# Altium PCB SPECCY2010.PcbDoc (part 2 of 2)
Units mil, origin at the board's own origin, x right, y up, seen from the top; angles counter-clockwise.
Board outline 6692.91 x 4724.41 mil, 2 copper layers (Top Layer, Bottom Layer); 70 components, 123 nets, 541 pads, 228 vias.
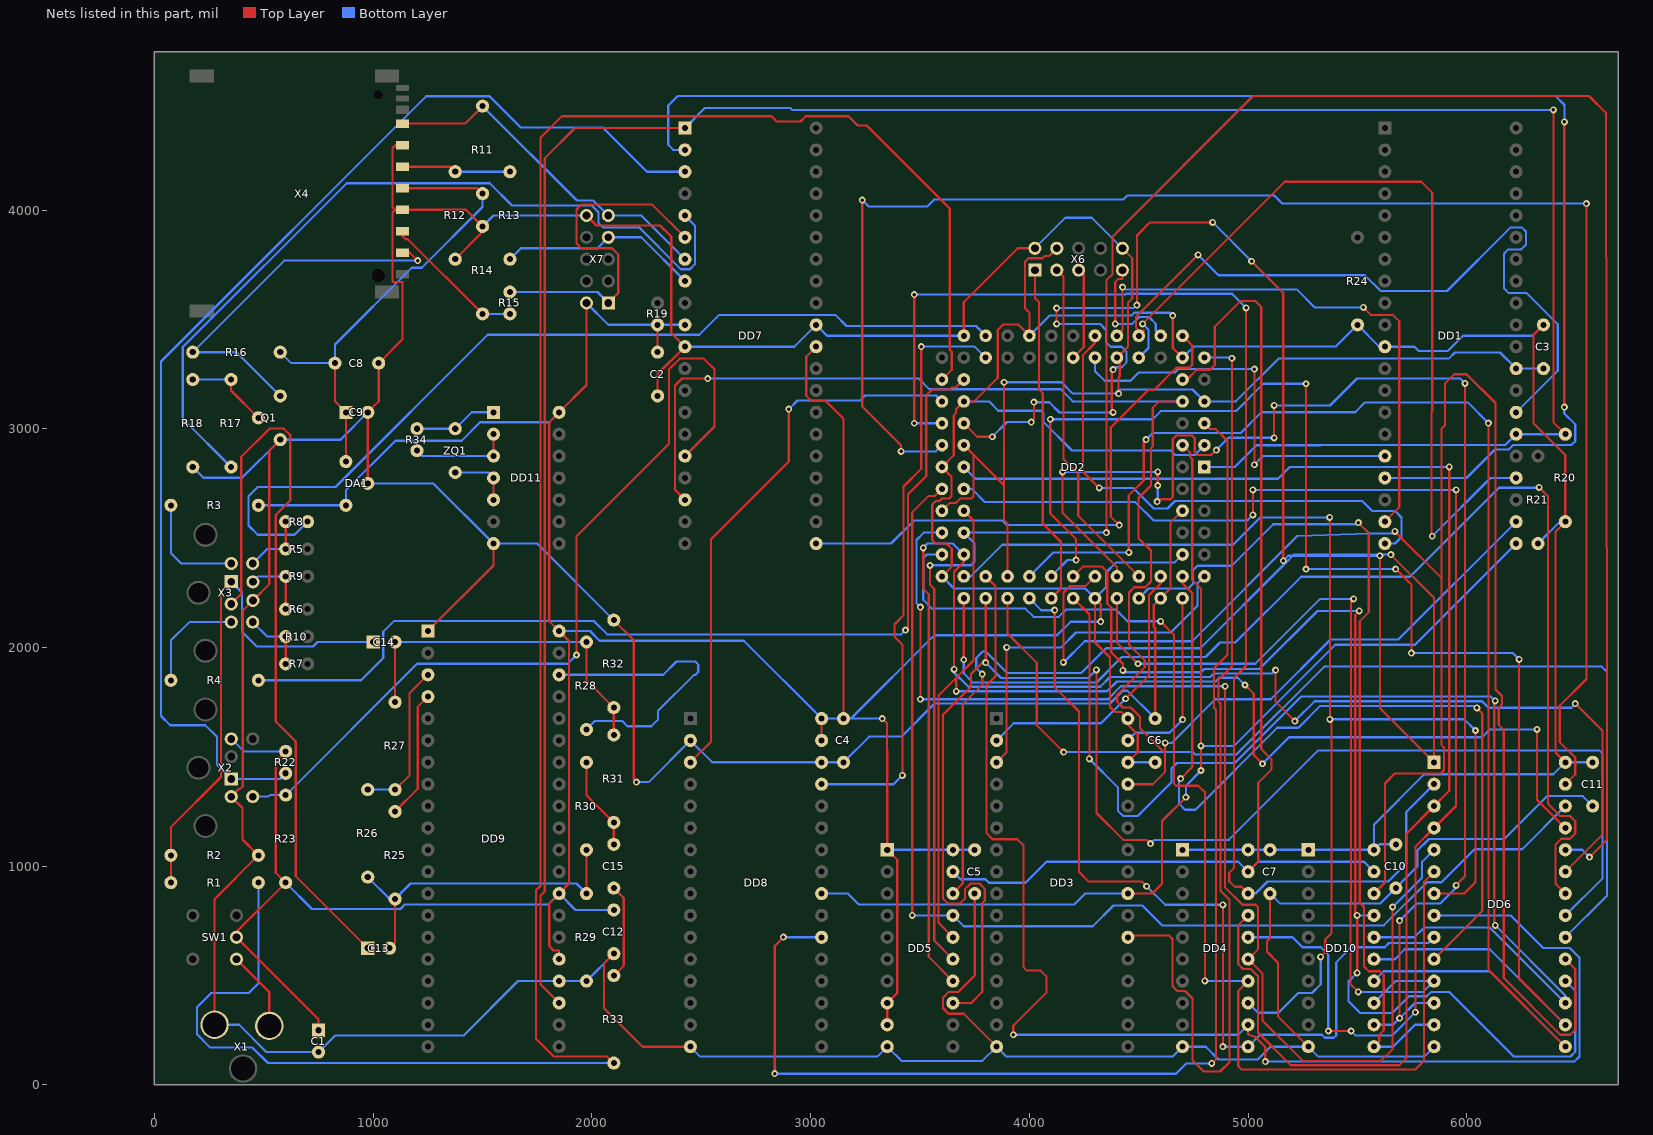
[diagram p2: the nets of this part, all layers, seen from the top]

## Via types
v1: diameter 31.5, hole 15.75, Top Layer to Bottom Layer, tented both sides, 228 vias

## Nets (pads, with @x,y where several pads share a name; then routed paths per layer and width w, separated by ;. In a path a pad name is that pad's centre, name@x,y a point inside that pad or via, vN(x,y) a via of type N, cw(c..) or ccw(c..) an arc to the next point about the centre after c; other vN are vias at no path point) (continued)
GND: C1.MINUS C2.2 C3.2 C4.2 C5.2 C6.2 C7.2 C8.2 C9.MINUS C10.2 C11.2 C12.2 DA1.2 DD1.29 DD2.7 DD2.19 DD2.32 DD2.42 DD2.47 DD2.59 DD2.72 DD2.82 DD3.16 DD4.10 DD5.10 DD6.14 DD7.11 DD7.31 DD8.2 DD8.16 DD8.30 DD9.1 DD9.24 DD10.10 DD11.7 Q1.1 R2.2 R12.2 R14.2 R18.1 R29.2 R32.2 X1.1 X2.3 X3.4 X4.3 X4.6 X6.2 X6.10 X7.10 | length 31758.3
  Top Layer w10: X1.1@275,275 275,850 R2.2@475,1050 402.5,1122.5 402.5,1266.5 X2.3@351,1318 386.5,1353.5 391.5,1353.5 403.5,1365.5 403.5,2168.5 X3.4@450,2215 524.5,2289.5 524.5,2899.5 Q1.1@575,2950 ; DA1.2@975,2750 C9.MINUS@975,3075 1025,3125 C8.2@1025,3300 1133.5,3408.5 1133.5,3670.5 1088.5,3670.5 1088.5,3988.18 1101.5,4001.18 ; X4.6@1133.66,4296.46 1101.5,4296.46 1088.5,4283.46 1088.5,4011.5 1098.81,4001.18 1101.5,4001.18 ; DD9.1@1250,2075 1550,2375 DD11.7@1550,2475 ; R12.2@1375,3775 1500,3900 R14.2@1500,3925 1423.82,4001.18 X4.3@1133.66,4001.18 ; X7.10@1975,3975 2020.5,3929.5 2311.5,3929.5 2362.5,3878.5 2362.5,3437.5 DD7.11@2425,3375 2300,3250 C2.2@2300,3150 ; C12.2@2100,600 2054.5,554.5 2054.5,351.5 2230.99,175 DD8.16@2450,175 ; R32.2@2100,2125 2190.75,2034.25 2190.75,1397.24 v1(2203.5,1384.5) ; DD2.47@3600,2625 3636,2661 3664,2661 3683.5,2680.5 3733.5,2680.5 3744.5,2691.5 3744.5,2880.5 ; DD2.32@3700,3425 3700,3578.5 3946.5,3825 X6.2@4025,3825 ; C5.2@3750,875 3750,500 3675.5,425.5 3631.5,425.5 3604.5,398.5 3604.5,351.5 3630.5,325.5 3699.5,325.5 DD3.16@3850,175 ; v1(3884.5,3212.5) 3884.5,2740.5 ; DD2.59@3900,2325 3900,2564.92 3884.5,2580.43 ; v1(4407.5,3160.5) 4407.5,3233.76 4413.24,3239.5 4413.24,3311.76 DD2.19@4400,3325 4450.5,3375.5 4450.5,3576.24 4470.5,3596.24 4470.5,3779.5 X6.10@4425,3825 ; C6.2@4575,1675 4575,2088.75 4568.75,2095 4568.75,2193.75 DD2.72@4600,2225 4644.5,2269.5 4644.5,2569.5 DD2.82@4700,2625 ; C7.2@5100,875 5100,671.24 5085.75,656.99 5085.75,609.75 5135.75,559.75 5135.75,314.25 DD10.10@5275,175 ; 1101.5,4001.18 X4.3@1133.66,4001.18 ; 1101.5,4001.18 X4.3@1133.66,4001.18 ; 3744.5,2880.5 DD2.42@3700,2925 3744.5,2880.5 ; 3744.5,2880.5 3884.5,2740.5 ; 3884.5,2580.43 3884.5,2740.5 ; 3884.5,2580.43 3884.5,2740.5
  Bottom Layer w10: R18.1@175,2825 224.5,2775.5 400.5,2775.5 Q1.1@575,2950 850,2950 C9.MINUS@975,3075 ; X1.1@275,275 386.99,275 511.99,150 C1.MINUS@750,150 825.5,225.5 1412.5,225.5 1662,475 DD9.24@1850,475 R29.2@1975,475 1975,475.5 2099.5,600 C12.2@2100,600 ; DA1.2@975,2750 1275,2750 DD11.7@1550,2475 1750,2475 R32.2@2100,2125 ; R14.2@1500,3925 1550,3975 X7.10@1975,3975 ; v1(2203.5,1384.5) 2259.5,1384.5 DD8.2@2450,1575 2550,1475 DD8.30@3050,1475 C4.2@3150,1475 3267.5,1592.5 3415.5,1592.5 3566.5,1743.5 4368.5,1743.5 4427.48,1802.48 4447.52,1802.48 C6.2@4575,1675 ; DD7.11@2425,3375 2925,3375 DD7.31@3025,3475 3075,3425 DD2.32@3700,3425 ; DD8.16@2450,175 2495.5,129.5 3304.5,129.5 DD5.10@3350,175 3415,110 3785,110 DD3.16@3850,175 3895.5,129.5 4654.5,129.5 DD4.10@4700,175 4805.99,175 4864.5,116.5 5043.5,116.5 5102,175 DD10.10@5275,175 5320.5,129.5 5804.5,129.5 DD6.14@5850,175 ; v1(3884.5,3212.5) 4146.5,3212.5 4198.5,3160.5 v1(4407.5,3160.5) 4407.5,3179.5 4745.5,3179.5 DD2.7@4800,3125 4943.5,3125 5138.99,3320.5 5917.56,3320.5 5945.31,3348.24 6151.76,3348.24 DD1.29@6225,3275 C3.2@6350,3275 ; X6.2@4025,3825 4164.5,3964.5 4285.5,3964.5 X6.10@4425,3825 ; C7.2@5100,875 5145,830 5605,830 C10.2@5675,900 5773.5,998.5 5773.5,1071.5 5826.5,1124.5 6170.5,1124.5 6366.5,1320.5 6529.5,1320.5 C11.2@6575,1275
INT: DD1.16 DD2.21 | length 1880.2
  Top Layer w10: v1(5028.5,2835.5) v1(5028.5,3272.5)
  Bottom Layer w10: DD2.21@4300,3325 4300,3263.24 4343.74,3219.5 4462.5,3219.5 4499.89,3256.89 4663.89,3256.89 4679.5,3272.5 v1(5028.5,3272.5) ; v1(5028.5,2835.5) 5068,2875 DD1.16@5625,2875
IOREQ: DD1.20 DD2.20 | length 2394.1
  Top Layer w10: DD2.20@4300,3425 4300,3392 4244.5,3336.5 4244.5,2804.5 v1(4319.5,2729.5)
  Bottom Layer w10: v1(4319.5,2729.5) 4474.75,2729.5 4568.5,2635.75 4631.5,2635.75 4665.5,2669.75 5521.24,2669.75 5566.5,2624.5 5671.5,2624.5 5701.5,2594.5 5701.5,2505 5671.5,2475 DD1.20@5625,2475
KCLK: DD7.16 R23.2 X2.5 | length 3931.1
  Top Layer w10: v1(1929.5,1965.5) 1929.5,2508.5 2352.5,2931.5 2352.5,3271.48 2401.52,3320.5 2511.5,3320.5 2560.5,3271.5 2560.5,3010.5 DD7.16@2425,2875
  Bottom Layer w10: X2.5@449,1318 520.5,1318 527.5,1325 R23.2@600,1325 1200.5,1925.5 1889.5,1925.5 v1(1929.5,1965.5)
KDAT: DD7.3 R22.2 X2.1 | length 5436.4
  Bottom Layer w10: R22.2@600,1425 574,1399 X2.1@351,1399 285.5,1464.5 285.5,1591.5 232.5,1644.5 71.5,1644.5 29.5,1686.5 29.5,3307.5 1242,4520 1531.5,4520 1674,4377.5 2049.5,4377.5 2251.99,4175 DD7.3@2425,4175
M1: DD1.27 DD2.16 | length 3352.2
  Top Layer w10: DD2.16@4500,3425 4522.5,3447.5 4521.24,3448.75 4500,3448.75 4499.5,3448.75 4486.75,3461.5 4486.75,3510.5 v1(4771.12,3794.87)
  Bottom Layer w10: v1(4771.12,3794.87) 4864.5,3701.5 5533.56,3701.5 5605.56,3629.5 5909.5,3629.5 6200.5,3920.5 6251.5,3920.5 6270.5,3901.5 6270.5,3841.5 6249,3820 6189.73,3820 6169.73,3800 6169.73,3641.76 6191.5,3620 6272.99,3620 6415.5,3477.5 6415.5,3265.5 DD1.27@6225,3075
MISO: DD7.7 R11.2 X4.7 X7.9 | length 1614.5
  Top Layer w10: X4.7@1133.66,4394.88 1419.88,4394.88 R11.2@1500,4475
  Bottom Layer w10: R11.2@1500,4475 1931.29,4043.71 2006.29,4043.71 X7.9@2075,3975 2225,3975 DD7.7@2425,3775
MOSI: DD7.6 R15.1 X7.1 | length 1644.7
  Top Layer w10: X7.1@2075,3575 2120.5,3620.5 2120.5,3796.5 2091.5,3825.5 1951.5,3825.5 1929.5,3847.5 1929.5,4002.5 1951.5,4024.5 2275.5,4024.5 DD7.6@2425,3875
  Bottom Layer w10: R15.1@1625,3625 2025,3625 X7.1@2075,3575
MREQ: DD1.19 DD2.18 | length 2506.1
  Top Layer w10: DD2.18@4400,3425 4425.91,3450.91 v1(4425.91,3647.5) ; v1(5526.5,3554.5) 5560.5,3520.5 5661.5,3520.5 5690.5,3491.5 5690.5,2640.5 DD1.19@5625,2575
  Bottom Layer w10: v1(4425.91,3647.5) 4436.29,3637.12 5221.87,3637.12 5304.5,3554.5 v1(5526.5,3554.5)
NetC8_1: C8.1 C9.PLUS DA1.1 R11.1 R16.2 X4.4 | length 2199.4
  Top Layer w10: C8.1@825,3300 825,3125 C9.PLUS@875,3075 DA1.1@875,2850 ; X4.4@1133.66,4099.61 1475.39,4099.61 R11.1@1500,4075
  Bottom Layer w10: R16.2@575,3350 625,3300 C8.1@825,3300 825,3385 1175.66,3735.66 1221.5,3735.66 1500,4014.16 R11.1@1500,4075
NetC13_MINUS: C13.MINUS R25.2 R26.2 R29.1 R30.1 | length 1524.8
  Top Layer w10: C13.MINUS@1075,625 1100,650 R25.2@1100,850 ; R29.1@1975,875 R30.1@1975,1075
  Bottom Layer w10: R26.2@975,950 1075,850 R25.2@1100,850 1170.5,920.5 1929.5,920.5 R29.1@1975,875
NetC14_MINUS: C14.MINUS R27.2 R28.2 R31.1 R32.1 | length 1626.8
  Top Layer w10: R27.2@1100,1750 C14.MINUS@1100,2025 ; R28.2@1975,2025 1975,1850 R32.1@2100,1725 R31.1@2100,1600
  Bottom Layer w10: C14.MINUS@1100,2025 R28.2@1975,2025
NetC15_1: C15.1 R30.2 R31.2 | length 426.8
  Top Layer w10: R30.2@1975,1475 1975,1325 R31.2@2100,1200 C15.1@2100,1100
NetC15_2: C15.2 R33.1 | length 437.7
  Top Layer w10: R33.1@2100,500 2145.5,545.5 2145.5,854.5 C15.2@2100,900
NetDD9_3: DD9.3 R26.1 R27.1 | length 712.1
  Top Layer w10: R27.1@1100,1350 1166.5,1416.5 1166.5,1791.5 DD9.3@1250,1875
  Bottom Layer w10: R26.1@975,1350 R27.1@1100,1350
NetDD9_4: DD9.4 R25.1 | length 587.1
  Top Layer w10: R25.1@1100,1250 1203.5,1353.5 1203.5,1728.5 DD9.4@1250,1775
NetDD9_38: DD9.38 R28.1 | length 1364
  Bottom Layer w10: DD9.38@1850,1875 2326,1875 2386.5,1935.5 2472.24,1935.5 2486.24,1921.5 2486.24,1888.24 2471.5,1873.5 2465.5,1873.5 2301.5,1709.5 2301.5,1669.49 2271.5,1639.49 2162.06,1639.49 2138.06,1663.5 2013.5,1663.5 R28.1@1975,1625
NetDD11_1: DD11.1 R34.1 ZQ1.1 | length 381.1
  Bottom Layer w10: R34.1@1200,3000 ZQ1.1@1375,3000 1450,3075 DD11.1@1550,3075
NetDD11_2: DD11.2 DD11.3 R34.2 | length 460.4
  Top Layer w10: DD11.3@1550,2875 DD11.2@1550,2975
  Bottom Layer w10: R34.2@1200,2900 1225,2875 DD11.3@1550,2875
NetDD11_4: DD11.4 DD11.5 ZQ1.2 | length 285.4
  Top Layer w10: DD11.5@1550,2675 DD11.4@1550,2775
  Bottom Layer w10: ZQ1.2@1375,2800 1525,2800 DD11.4@1550,2775
NetQ1_2: Q1.2 R17.1 R18.2 | length 401.8
  Top Layer w10: R17.1@350,3225 350,3175 Q1.2@475,3050
  Bottom Layer w10: R18.2@175,3225 R17.1@350,3225
NetQ1_3: Q1.3 R16.1 X4.1 | length 1769.4
  Top Layer w10: X4.1@1133.66,3804.33 1167.66,3804.33 v1(1203.5,3768.5)
  Bottom Layer w10: Q1.3@575,3150 375,3350 R16.1@175,3350 593.5,3768.5 v1(1203.5,3768.5)
NetR3_2: R3.2 X3.3 | length 514.2
  Bottom Layer w10: R3.2@75,2650 75,2431.5 122.5,2384 X3.3@351,2384
NetR4_2: R4.2 X3.5 | length 492.5
  Bottom Layer w10: R4.2@75,1850 75,2031.5 159.5,2116 X3.5@351,2116
NetR5_2: R5.2 R8.2 X3.6 | length 303.3
  Top Layer w10: R5.2@600,2450 R8.2@600,2575
  Bottom Layer w10: X3.6@449,2384 515,2450 R5.2@600,2450
NetR6_2: R6.2 R9.2 X3.7 | length 310.4
  Top Layer w10: R6.2@600,2175 R9.2@600,2325
  Bottom Layer w10: X3.7@450,2300 475,2325 R9.2@600,2325
NetR7_2: R7.2 R10.2 X3.8 | length 303.3
  Top Layer w10: R7.2@600,1925 R10.2@600,2050
  Bottom Layer w10: X3.8@449,2116 515,2050 R10.2@600,2050
NetR12_1: R12.1 R13.2 X4.5 | length 500.9
  Top Layer w10: X4.5@1133.66,4198.03 1351.97,4198.03 R12.1@1375,4175
  Bottom Layer w10: R12.1@1375,4175 R13.2@1625,4175
NetR14_1: R14.1 R15.2 X4.2 | length 660.6
  Top Layer w10: X4.2@1133.66,3902.76 1133.5,3902.76 1133.5,3881.5 1148.5,3866.5 1158.5,3866.5 R14.1@1500,3525
  Bottom Layer w10: R14.1@1500,3525 R15.2@1625,3525
NetSW1_1: SW1.1 X1.3 | length 367.1
  Top Layer w10: SW1.1@375,575 525,425 X1.3@525,270
NMI: DD1.17 DD7.2 | length 6895.5
  Top Layer w10: v1(6445.5,3098.5) v1(6445.5,4402.5)
  Bottom Layer w10: DD7.2@2425,4275 2371.5,4275 2348.5,4298 2348.5,4477.5 2391.5,4520.5 6405.78,4520.5 6446.5,4479.78 6446.5,4403.5 v1(6445.5,4402.5) ; DD1.17@5625,2775 5998,2775 6128.5,2905.5 6191.5,2905.5 6211.5,2925.5 6477.5,2925.5 6495,2943 6495,3020 6445.5,3069.5 v1(6445.5,3098.5)
R: DD2.30 R8.1 | length 4200
  Bottom Layer w10: R8.1@700,2575 640.5,2515.5 471.5,2515.5 429.5,2557.5 429.5,2691.5 471.5,2733.5 827.24,2733.5 1523.24,3429.5 2490.5,3429.5 2581.5,3520.5 3112.5,3520.5 3163.5,3469.5 3755.5,3469.5 DD2.30@3800,3425
RAM_A14: DD2.75 DD3.3 | length 1643
  Top Layer w10: DD3.3@3850,1475 3895.5,1520.5 v1(3895.5,2000.5)
  Bottom Layer w10: v1(3895.5,2000.5) 4145.04,2000.5 4213.29,2068.75 4645.75,2068.75 4768.35,2191.35 4768.35,2293.35 DD2.75@4800,2325
RAM_A15: DD2.74 DD3.31 | length 844.4
  Top Layer w10: v1(4700,1670) DD2.74@4700,2225
  Bottom Layer w10: DD3.31@4450,1575 4485,1610 4640,1610 v1(4700,1670)
RAM_A16: DD2.73 DD3.2 | length 1294.4
  Top Layer w10: v1(4439.5,1765.47) 4547.24,1873.22 4547.24,2239.74 4600,2292.5 DD2.73@4600,2325
  Bottom Layer w10: DD3.2@3850,1575 3928.34,1653.34 4327.36,1653.34 v1(4439.5,1765.47)
RAM_CS: DD2.11 DD3.22 | length 4426.1
  Top Layer w10: DD3.22@4450,675 4457.5,682.5 4639.5,682.5 4654.5,667.5 4654.5,451.5 4676.5,429.5 4711.5,429.5 4745.5,395.5 4745.5,113.5 4797.5,61.5 4871.5,61.5 4915.24,105.24 4915.24,845.75 4873.5,887.49 4873.5,1743.75 4863.75,1753.5 4863.75,1851.5 4925.5,1913.24 v1(4925.5,3322.5)
  Bottom Layer w10: DD2.11@4800,3325 4922.99,3325 v1(4925.5,3322.5)
RD: DD1.21 DD2.4 DD3.24 DD8.24 | length 6271.8
  Top Layer w10: DD3.24@4450,875 4561.71,875 4606.44,919.73 4606.44,1206.44 v1(4715.5,1315.5) ; DD2.4@4700,2925 4735.42,2889.58 4735.42,2870.08 4744.5,2861 4744.5,2308.5 4784.5,2268.5 ; v1(4784.5,1437.5) v1(4784.5,1550.22) ; v1(4784.5,1550.22) 4784.5,2268.5 ; v1(4784.5,1550.22) 4784.5,2268.5
  Bottom Layer w10: DD8.24@3050,875 3168.99,875 3218.5,825.5 4206,825.5 4255.5,875 DD3.24@4450,875 ; v1(4715.5,1315.5) 4715.5,1368.5 v1(4784.5,1437.5) ; v1(4784.5,1550.22) 4935.75,1550.22 5398.03,2012.5 5762.5,2012.5 DD1.21@6225,2475
ROM_A14: DD2.31 DD8.29 | length 2727.8
  Top Layer w10: v1(3419.5,1415.5) 3419.5,2012 3382.75,2048.75 3382.75,2105.25 3424.24,2146.74 3424.24,2735.58 3505.5,2816.84 v1(3505.5,3375.5)
  Bottom Layer w10: DD8.29@3050,1375 3379,1375 v1(3419.5,1415.5) ; v1(3505.5,3375.5) 3749.5,3375.5 DD2.31@3800,3325
ROM_A15: DD2.37 DD8.3 | length 2538
  Top Layer w10: DD8.3@2450,1475 2544.5,1569.5 2544.5,2494.91 2899.5,2849.91 v1(2899.5,3089.5)
  Bottom Layer w10: v1(2899.5,3089.5) 2939.5,3129.5 3226.11,3129.5 3248.3,3151.68 3573.32,3151.68 DD2.37@3600,3125
ROM_CS: DD2.5 DD8.22 | length 5855.6
  Top Layer w10: v1(2835.5,51.5) 2835.5,635.5 v1(2875.5,675.5) ; DD2.5@4800,3025 4826.86,2998.14 4851.5,2998.14 4905.5,2944.14 4905.5,1966.99 4843.75,1905.24 4843.75,1723.75 4853.5,1713.99 4853.5,117.9 v1(4833.75,98.15)
  Bottom Layer w10: v1(2835.5,51.5) 4669.9,51.5 4716.56,98.15 v1(4833.75,98.15) ; v1(2875.5,675.5) 2875.99,675 DD8.22@3050,675
RST_CPU: DD1.26 DD2.1 DD7.1 DD9.23 R20.2 | length 11832.5
  Top Layer w10: DD9.23@1850,375 1764.5,460.5 1764.5,864.27 1784.5,884.27 1784.5,4237 1922.5,4375 DD7.1@2425,4375 ; v1(6395.5,4457.5) 6395.5,3029.5 R20.2@6450,2975
  Bottom Layer w10: DD7.1@2425,4375 2516.24,4466.24 2906.5,4466.24 2915.25,4457.5 v1(6395.5,4457.5) ; DD2.1@4800,2825 4938.73,2825 5038.48,2924.75 5329.5,2924.75 5330.24,2925.5 6175.5,2925.5 DD1.26@6225,2975 R20.2@6450,2975
SCK: DD7.8 R13.1 X7.7 | length 924.3
  Bottom Layer w10: R13.1@1625,3775 1675.5,3825.5 2025.5,3825.5 X7.7@2075,3875 2225,3875 DD7.8@2425,3675
SDC: DD7.5 R17.2 | length 3733.7
  Bottom Layer w10: R17.2@350,2825 129.5,3045.5 129.5,3373.5 878.5,4122.5 1532.5,4122.5 1634.5,4020.5 1999.5,4020.5 2029.5,3990.5 2029.5,3942 2051.5,3920 2215.99,3920 2406.5,3729.5 2448.5,3729.5 2470.5,3751.5 2470.5,3929.5 DD7.5@2425,3975
SOUND_L: C14.PLUS R1.2 R2.1 X3.1 | length 2376.1
  Top Layer w10: R1.2@75,925 R2.1@75,1050 75,1178.5 304.5,1407.99 304.5,2254.5 X3.1@351,2301
  Bottom Layer w10: X3.1@351,2301 400.5,2251.5 400.5,2071.5 467.5,2004.5 724.99,2004.5 745.5,2025 C14.PLUS@1000,2025
SOUND_R: C13.PLUS X3.2 | length 3528.8
  Top Layer w10: X3.2@351,2199 396.5,2244.5 396.5,2871.5 525.5,3000.5 591.5,3000.5 620.5,2971.5 620.5,2671.5 554.5,2605.5 554.5,1661.5 645.5,1570.5 645.5,954.5 C13.PLUS@975,625
SPEAKER: DD2.35 R1.1 R33.2 | length 10309.6
  Top Layer w10: R33.2@2100,100 2070.5,129.5 1826.5,129.5 1744.5,211.5 1744.5,889.5 1764.5,909.5 1764.5,4330.5 1862.5,4428.5 2821.23,4428.5 2845,4404.73 2953.76,4404.73 2977.53,4428.5 3172.56,4428.5 3214.74,4386.32 3256.92,4386.32 3636,4007.24 3636,3361 3644.5,3352.5 3644.5,3269.5 DD2.35@3600,3225
  Bottom Layer w10: R1.1@475,925 475,463.5 431.5,420 260,420 194.5,354.5 194.5,231.5 255.5,170.5 448.5,170.5 518.99,100 R33.2@2100,100
SYNC: DD2.36 R4.1 | length 4487.9
  Top Layer w10: v1(3433.5,2079.5) 3444.24,2090.24 3444.24,2699.24 3528.5,2783.5 3528.5,3152.5 3554.82,3178.82 3636,3178.82 3646.18,3189 3664,3189 DD2.36@3700,3225
  Bottom Layer w10: R4.1@475,1850 944,1850 1045.5,1951.5 1045.5,2071.5 1094.5,2120.5 2009.62,2120.5 2070.12,2060 3414,2060 v1(3433.5,2079.5)
TAPE_IN: DD2.12 DD7.21 | length 2543.4
  Top Layer w10: v1(4410.5,2559.5) 4371.75,2598.24 4371.75,3005.95 4542.3,3176.5 4569.5,3176.5 4671.5,3278.5 4731.5,3278.5 4744.5,3291.5 4744.5,3380.5 DD2.12@4700,3425
  Bottom Layer w10: DD7.21@3025,2475 3367.5,2475 3472.99,2580.5 3875.5,2580.5 3896.5,2559.5 v1(4410.5,2559.5)
TCK: DD2.62 X6.1 | length 1567.9
  Top Layer w10: X6.1@4025,3725 4025,3597.5 4044.5,3578 4044.5,3178.31 4060.57,3162.24 4060.57,2566.43 4144.5,2482.5 4144.5,2269.5 DD2.62@4100,2225
TDI: DD2.14 X6.9 | length 545.1
  Top Layer w10: v1(4392.5,3479.5) 4392.5,3671.5 4405,3684 4425,3684 X6.9@4425,3725
  Bottom Layer w10: v1(4392.5,3479.5) 4470.5,3479.5 4501.5,3510.5 4546.38,3510.5 4577.38,3479.5 4577.38,3447.62 DD2.14@4600,3425
TDO: DD2.71 X6.3 | length 1555.3
  Top Layer w10: X6.3@4125,3725 4155.5,3694.5 4155.5,2859.99 4223.23,2792.26 4223.23,2601.77 DD2.71@4500,2325
TMS: DD2.23 X6.5 | length 429.8
  Top Layer w10: DD2.23@4200,3325 4248.5,3373.5 4248.5,3701.5 X6.5@4225,3725
VA0: DD2.56 DD5.13 DD6.21 | length 6935.1
  Top Layer w10: DD5.13@3650,375 3734,375 3784.5,425.49 3784.5,830.5 3795.5,841.5 3795.5,896.5 3771.5,920.5 3731.5,920.5 3705,894 3705,851.5 3683.5,830 3626.5,830 3605,851.5 3605,1692.21 3733.02,1820.24 3733.02,1878.29 3785.72,1930.99 v1(3800,1930.99) DD2.56@3800,2225 ; v1(4306.5,1897.5) 4306.5,1243.5 4429.5,1120.5 4536.5,1120.5 v1(4553.5,1103.5)
  Bottom Layer w10: v1(3800,1930.99) 3870.5,1860.5 4269.5,1860.5 v1(4306.5,1897.5) ; v1(4553.5,1103.5) 4570.5,1120.5 4911.5,1120.5 5320.5,1529.5 6605.5,1529.5 6620.5,1514.5 6620.5,945.5 DD6.21@6450,775
VA1: DD2.52 DD5.14 DD6.23 | length 6837.4
  Top Layer w10: v1(3514.5,2455.5) 3514.5,2268.5 3539.5,2243.5 3539.5,585.5 DD5.14@3650,475 ; v1(3655.5,1899.5) 3655.5,2346.49 3700,2390.99 DD2.52@3700,2425 ; v1(5125.5,1896.22) 5125.5,1751.5 v1(5213.5,1663.5) ; DD6.23@6450,975 6620.5,1145.5 6620.5,1618.5 v1(6495.5,1743.5)
  Bottom Layer w10: v1(3514.5,2455.5) 3534.5,2475.5 3649.5,2475.5 DD2.52@3700,2425 ; v1(3655.5,1899.5) 3655.5,1886 3721.24,1820.25 4324.25,1820.25 4368.75,1864.75 4826.98,1864.75 4843.75,1881.52 5110.79,1881.52 v1(5125.5,1896.22) ; v1(5213.5,1663.5) 5304.56,1754.56 6068.94,1754.56 6098.75,1724.75 6476.75,1724.75 v1(6495.5,1743.5)
VA2: DD2.50 DD5.15 DD6.24 | length 10338.3
  Top Layer w10: v1(3545.5,2375.5) 3545.5,2286.5 3565,2266.99 3565,660 DD5.15@3650,575 ; v1(4351.75,2525) 4351.75,3678.24 4379.41,3705.9 4379.41,3878.41 5022.5,4521.5 6558.5,4521.5 6635.5,4444.5 6640.5,1794.5 6640.5,1121.5 v1(6560.5,1041.5)
  Bottom Layer w10: v1(3545.5,2375.5) 3731.5,2375.5 3748.99,2392.99 3748.99,2476.01 DD2.50@3700,2525 v1(4351.75,2525) ; DD6.24@6450,1075 6526.99,1075 v1(6560.5,1041.5)
VA3: DD2.48 DD5.16 DD6.25 | length 5811.9
  Top Layer w10: DD5.16@3650,675 3585,740 3585,1781.02 3665.5,1861.52 ; v1(3665.5,1799.44) 3665.5,1861.52 ; DD2.48@3700,2625 3744.5,2580.5 3744.5,1940.52 ; v1(4985.5,1828.5) 5025.5,1788.5 5025.5,1508.5 v1(5065.5,1468.5) ; v1(6320.5,1625.5) 6320.5,1304.5 DD6.25@6450,1175 ; 3665.5,1861.52 3744.5,1940.52 ; 3665.5,1861.52 3744.5,1940.52
  Bottom Layer w10: v1(3665.5,1799.44) 4354.93,1799.44 4400.24,1844.75 4851.5,1844.75 4868.27,1861.52 4952.47,1861.52 v1(4985.5,1828.5) ; v1(5065.5,1468.5) 5186.75,1589.75 6070.24,1589.75 6105.99,1625.5 v1(6320.5,1625.5)
VA4: DD2.45 DD5.17 DD6.26 | length 5331.7
  Top Layer w10: v1(3464.5,775) 3464.5,2617.69 3539.92,2693.11 3568.11,2693.11 DD2.45@3600,2725
  Bottom Layer w10: v1(3464.5,775) DD5.17@3650,775 3699.5,725.5 4289.5,725.5 4384.5,820.5 4515.5,820.5 4606.5,729.5 5620.5,729.5 5817.5,926.5 5883.67,926.5 6034.67,1077.5 6252.5,1077.5 DD6.26@6450,1275
VA5: DD2.40 DD5.18 DD6.1 | length 10230.5
  Top Layer w10: DD5.18@3650,875 3695.5,920.5 3695.5,1740.5 3784.5,1829.5 v1(3784.5,1878.5) ; DD2.40@3700,3025 3761.5,2963.5 v1(3830.5,2963.5) ; v1(4008.5,3030.5) 4020.5,3042.5 v1(4020.5,3121.5) ; v1(4124.5,3479.5) v1(4124.5,3551.5) ; v1(4382.5,3074.5) 4376.5,3080.5 4376.5,3264.5 v1(4382.5,3270.5) ; v1(4491.5,3565.5) 4491.5,3883.5 4551.5,3943.5 v1(4837.5,3943.5) ; v1(5015.5,3765.5) 5160.5,3620.5 v1(5160.5,2396.5) ; v1(5602.5,2419.5) 5602.5,1722.5 DD6.1@5850,1475 5850,2226.99 v1(5652.5,2424.5)
  Bottom Layer w10: v1(3784.5,1878.5) 3756.79,1906.2 3756.79,1951.5 3787.08,1981.79 3800.2,1981.79 3898.3,1883.69 4237.2,1883.69 4349.75,1996.24 4780.4,1996.24 5170.57,2386.42 5203.65,2419.5 ; v1(3830.5,2963.5) 3897.5,3030.5 v1(4008.5,3030.5) ; v1(4020.5,3121.5) 4090.5,3121.5 4137.5,3074.5 v1(4382.5,3074.5) ; v1(4124.5,3479.5) 4322.5,3479.5 4350.5,3451.5 4350.5,3395.5 4371.5,3374.5 4421.5,3374.5 4444.5,3351.5 4444.5,3303.5 4422,3281 4393,3281 v1(4382.5,3270.5) ; v1(4124.5,3551.5) 4477.5,3551.5 v1(4491.5,3565.5) ; v1(4837.5,3943.5) v1(5015.5,3765.5) ; v1(5160.5,2396.5) 5183.5,2419.5 5203.65,2419.5 ; v1(5602.5,2419.5) 5203.65,2419.5 ; v1(5652.5,2424.5) 5602.5,2424.5 5208.65,2424.5 5203.65,2419.5
VA6: DD2.39 DD4.18 DD6.2 | length 6217.8
  Top Layer w10: v1(3473.5,3025) v1(3473.5,3613.5) ; v1(4990.5,3552.5) 4990.5,1914.99 4934.75,1859.24 4934.75,991.24 4913.5,970 4913.5,931.5 4939.2,905.8 4969.2,905.8 DD4.18@5000,875
  Bottom Layer w10: v1(3473.5,3025) DD2.39@3600,3025 ; v1(3473.5,3613.5) 4437.38,3613.5 4441,3617.12 4925.87,3617.12 v1(4990.5,3552.5) ; DD4.18@5000,875 5033.5,875 5088.5,930 5640,930 5722.5,1012.5 5722.5,1247.5 DD6.2@5850,1375
VA7: DD2.44 DD4.17 DD6.3 | length 6413.1
  Top Layer w10: DD4.17@5000,775 4955,730 4955,551.5 4976.5,530 5011.5,530 5045,496.5 5045,240 5195,90 5690.36,90 5724.5,124.14 5724.5,1149.5 DD6.3@5850,1275 5919.5,1344.5 v1(5919.5,2825.5)
  Bottom Layer w10: DD2.44@3700,2825 3753.25,2771.75 5136.75,2771.75 5190.5,2825.5 v1(5919.5,2825.5)
VA8: DD2.46 DD4.16 DD6.4 | length 6099
  Top Layer w10: v1(5021.5,2606.5) v1(5021.5,2720.5) ; v1(5366.5,246.5) v1(5470.5,246.5) ; v1(5764.5,332.5) 5764.5,1089.5 DD6.4@5850,1175 5950.5,1275.5 v1(5950.5,2720.5)
  Bottom Layer w10: DD2.46@3700,2725 3735.99,2725 3796.5,2664.5 4484,2664.5 4568,2580.5 4995.5,2580.5 v1(5021.5,2606.5) ; DD4.16@5000,675 5202.74,675 5248.24,629.5 5331.5,629.5 5366.5,594.5 v1(5366.5,246.5) ; v1(5021.5,2720.5) v1(5950.5,2720.5) ; v1(5470.5,246.5) 5491.5,225.5 5657.5,225.5 v1(5764.5,332.5)
VA9: DD2.49 DD4.15 DD6.5 | length 5639
  Top Layer w10: v1(3501.5,1763.5) v1(3501.5,2184.5) ; v1(4894.5,1822.48) 4893.5,1821.49 4893.5,903.79 4973.8,823.5 5033.5,823.5 5045.5,811.5 5045.5,620.5 DD4.15@5000,575 5065,510 5065,294.99 5249.99,110 5606.79,110 5660.5,163.71 v1(5660.5,813.5)
  Bottom Layer w10: v1(3501.5,1763.5) 4358.99,1763.5 4417.98,1822.48 v1(4894.5,1822.48) ; v1(3501.5,2184.5) 3483.5,2202.5 3483.5,2491.5 3517,2525 DD2.49@3600,2525 ; v1(5660.5,813.5) 5795.5,948.5 5795.5,1020.5 DD6.5@5850,1075
VA10: DD2.51 DD4.14 DD6.6 | length 5585.3
  Top Layer w10: v1(4599.5,2119.5) 4660.5,2058.5 4660.5,1378.5 4671.5,1367.5 4772.5,1367.5 4802.5,1337.5 v1(4802.5,475.5) ; DD4.14@5000,475 4954.5,429.5 4954.5,86.5 4970.99,70 5763,70 5804.5,111.5 5804.5,929.5 DD6.6@5850,975
  Bottom Layer w10: DD2.51@3600,2425 3531.5,2425 3514.5,2408 3514.5,2217.5 3554.5,2177.5 3981.5,2177.5 4019.24,2139.75 4134.75,2139.75 4168.5,2173.5 4394.5,2173.5 4448.5,2119.5 v1(4599.5,2119.5) ; v1(4802.5,475.5) 4802.99,475 DD4.14@5000,475
VA11: DD2.55 DD4.13 DD6.7 | length 5937.7
  Top Layer w10: v1(5331.5,585.5) 5352.5,606.5 5352.5,664.5 5380.5,692.5 5380.5,1664.5 v1(5373.5,1671.5) 5373.5,2593.5 v1(5372.5,2594.5) ; DD6.7@5850,875 5987.34,875 6039.5,927.15 v1(6039.5,1620.5)
  Bottom Layer w10: DD2.55@3700,2325 3731.5,2325 3875.99,2469.5 4930.5,2469.5 5055.5,2594.5 v1(5372.5,2594.5) ; DD4.13@5000,375 5045.25,329.75 5138.75,329.75 5229.5,420.5 5291.5,420.5 5331.5,460.5 v1(5331.5,585.5) ; v1(5373.5,1671.5) 5988.5,1671.5 v1(6039.5,1620.5)
VA12: DD2.57 DD4.12 DD6.8 | length 6355.3
  Top Layer w10: DD2.57@3800,2325 3844.5,2280.5 3844.5,1868.5 3804.5,1828.5 3804.5,1150.5 3831.5,1123.5 3944.93,1123.5 3973.5,1094.93 3973.5,537.5 3988.5,522.5 4051.5,522.5 4077.5,496.5 4077.5,421.5 3926.5,270.5 v1(3926.5,229.5) ; DD4.12@5000,275 5000,231.5 5031.5,220.5 5078.5,173.5 v1(5078.5,106.5)
  Bottom Layer w10: v1(3926.5,229.5) 4954.5,229.5 DD4.12@5000,275 ; v1(5078.5,106.5) 6491.5,106.5 6515,130 6515,581.99 6471.5,625.5 6350.5,625.5 6200.99,775 DD6.8@5850,775
VA13: DD2.60 DD4.11 DD6.9 | length 4128.9
  Top Layer w10: v1(4115.5,2170.5) 4115.5,1818.5 4226.5,1707.5 4226.5,974.5 4271.5,929.5 4514.5,929.5 v1(4535.5,908.5) ; v1(4884.5,175.5) v1(4884.5,823.5)
  Bottom Layer w10: DD2.60@4000,2225 4054.5,2170.5 v1(4115.5,2170.5) ; v1(4535.5,908.5) 4620.5,823.5 v1(4884.5,823.5) ; v1(4884.5,175.5) 4884.99,175 DD4.11@5000,175 5054.5,229.5 5336.09,229.5 5350.26,215.33 5391.5,215.33 5402.46,226.3 5402.46,560.46 5471.5,629.5 5624.5,629.5 5643.5,648.5 5823.5,648.5 DD6.9@5850,675
VA14: DD2.76 DD6.10 | length 3905.5
  Top Layer w10: v1(4691.5,1400.5) 4744.5,1453.5 4744.5,2249 4700,2293.5 DD2.76@4700,2325 ; DD6.10@5850,575 6070.5,795.5 6070.5,1698.5 v1(6045.5,1723.5)
  Bottom Layer w10: v1(4691.5,1400.5) 4684.5,1393.5 4684.5,1285.5 4711.5,1258.5 4759.12,1258.5 5133.37,1632.75 5229.81,1632.75 5329.93,1732.87 6036.12,1732.87 v1(6045.5,1723.5)
VAGEN: DD2.10 DD4.19 DD5.19 DD10.19 | length 5309.6
  Top Layer w10: DD2.10@4700,3225 4720,3225 4764.5,3269.5 4825.5,3269.5 4847.5,3291.5 4847.5,3466.5 4965.5,3584.5 5031.5,3584.5 5059.5,3556.5 5059.5,1535.99 5106.24,1489.24 5106.24,1441.5 5046.5,1381.75 5046.5,1021.5 DD4.19@5000,975
  Bottom Layer w10: DD5.19@3650,975 3685,940 3799.5,940 3815,924.5 3982.5,924.5 4078.5,1020.5 4954.5,1020.5 DD4.19@5000,975 5045.5,1020.5 5529.5,1020.5 DD10.19@5575,975
VCC: C1.PLUS C2.1 C3.1 C4.1 C5.1 C6.1 C7.1 C10.1 C11.1 C12.1 DA1.3 DD1.11 DD2.3 DD2.13 DD2.26 DD2.38 DD2.43 DD2.53 DD2.66 DD2.78 DD3.30 DD3.32 DD4.1 DD4.20 DD5.1 DD5.8 DD5.9 DD5.20 DD6.28 DD7.10 DD7.30 DD8.31 DD8.32 DD9.25 DD9.28 DD9.40 DD10.1 DD10.20 DD11.14 R3.1 R19.1 R20.1 R21.1 R22.1 R23.1 R24.1 SW1.2 X2.4 X6.4 X7.2 | length 28540.1
  Top Layer w10: R22.1@600,1525 554.5,1479.5 554.5,970.5 R23.1@600,925 375,700 SW1.2@375,675 750,300 C1.PLUS@750,250 ; DD9.25@1850,575 1850,614.93 1824.5,614.93 1804.5,634.93 1804.5,829.5 DD9.28@1850,875 1895.5,920.5 1895.5,2029.5 DD9.40@1850,2075 1804.5,2120.5 1804.5,3029.5 DD11.14@1850,3075 1975,3200 X7.2@1975,3575 ; C2.1@2300,3350 R19.1@2300,3475 ; DD7.30@3025,3375 2979.5,3329.5 2979.5,3151.5 3003.5,3127.5 3067.5,3127.5 3150,3044.99 C4.1@3150,1675 ; DD8.31@3050,1575 DD8.32@3050,1675 ; v1(3326.99,1675) 3349.5,1652.5 3350,1413.99 DD5.1@3350,1075 3395.5,1029.5 3395.5,420.5 DD5.8@3350,375 DD5.9@3350,275 ; DD2.53@3600,2325 3644.5,2369.5 3644.5,2451.5 3620.5,2475.5 3571.5,2475.5 3555.5,2491.5 3555.5,2653.5 3571.5,2669.5 3588.99,2669.5 3600.5,2681 3633.5,2681 3644,2691.5 3644,2781 DD2.43@3600,2825 3653.82,2878.82 3653.82,3061 3664,3071.18 3664,3089 DD2.38@3700,3125 3748.04,3125 3855.5,3232.46 3855.5,3451.5 3880.5,3476.5 3948.5,3476.5 DD2.26@4000,3425 4000,3529.99 3979.5,3550.5 3979.5,3763.5 3995.17,3779.17 4060,3779.17 4070.83,3790 4090,3790 X6.4@4125,3825 ; v1(4326,2118) 4326,2199 DD2.66@4300,2225 4300,2023.15 4368.75,1954.41 4368.75,1728.22 4391.5,1705.47 4419.53,1705.47 DD3.32@4450,1675 4450,1647.99 4495.5,1602.5 4495.5,1520.5 DD3.30@4450,1475 ; v1(4655.5,3517.5) 4655.5,3369.5 DD2.13@4700,3325 ; C3.1@6350,3475 6304.5,3429.5 6304.5,3025.5 6450,2879.99 R20.1@6450,2575 6404.75,2529.75 6404.75,1520.25 DD6.28@6450,1475
  Bottom Layer w10: X2.4@351,1582 408,1525 R22.1@600,1525 ; R3.1@475,2650 DA1.3@875,2650 875,2718.5 1101.99,2945.5 1404.5,2945.5 1488.5,3029.5 1804.5,3029.5 DD11.14@1850,3075 ; R23.1@600,925 720.5,804.5 1124.5,804.5 1145.5,825.5 1800.5,825.5 DD9.28@1850,875 1925,800 C12.1@2100,800 ; DD9.40@1850,2075 1990.99,2075 2034.84,2031.15 2693.85,2031.15 DD8.32@3050,1675 C4.1@3150,1675 3184,1675 ; X7.2@1975,3575 2075,3475 R19.1@2300,3475 DD7.10@2425,3475 ; v1(3326.99,1675) 3184,1675 ; DD5.1@3350,1075 DD5.20@3650,1075 C5.1@3750,1075 ; DD2.53@3600,2325 3655.5,2269.5 4255.5,2269.5 DD2.66@4300,2225 4350.5,2275.5 4350.5,2342.5 4397,2389 4664,2389 DD2.78@4700,2425 ; DD2.38@3700,3125 3814.99,3125 3857.84,3082.15 4052.59,3082.15 4063.24,3071.5 4063.24,3031.5 4194.5,2900.24 4647.24,2900.24 4667.24,2880.24 4755.24,2880.24 DD2.3@4800,2925 ; DD2.26@4000,3425 4092.5,3517.5 4466.34,3517.5 4479.34,3530.5 4642.5,3530.5 v1(4655.5,3517.5) ; v1(4326,2118) 4189,2118 4126.5,2055.5 3564.5,2055.5 3184,1675 ; DD3.30@4450,1475 C6.1@4575,1475 ; DD4.1@4700,1075 DD4.20@5000,1075 C7.1@5100,1075 DD10.1@5275,1075 DD10.20@5575,1075 ; DD2.13@4700,3325 4730.5,3355.5 4733.5,3355.5 4754.5,3376.5 5401.5,3376.5 R24.1@5500,3475 5600,3375 DD1.11@5625,3375 5760.71,3375 5780,3355.71 5912.04,3355.71 5981.83,3425.5 6300.5,3425.5 C3.1@6350,3475 ; C10.1@5675,1100 5600,1100 DD10.20@5575,1075 ; R21.1@6325,2475 6425,2575 R20.1@6450,2575 ; C11.1@6575,1475 DD6.28@6450,1475 6395,1420 5805.5,1420 5575,1189.5 DD10.20@5575,1075
VD0: DD2.68 DD6.11 DD10.13 | length 3948.9
  Top Layer w10: DD2.68@4400,2225 4400,2021.99 v1(4496.5,1925.5) ; v1(5481.99,2222.24) 5470,2210.26 5470,823.81 5467.75,821.55 5467.75,460.96 v1(5503.21,425.5)
  Bottom Layer w10: v1(4496.5,1925.5) 5032.34,1925.5 5329.09,2222.24 v1(5481.99,2222.24) ; v1(5503.21,425.5) 5625.5,425.5 ; DD10.13@5575,375 5625.5,425.5 ; 5625.5,425.5 5675,475 DD6.11@5850,475 5800.5,425.5 5625.5,425.5
VD1: DD2.69 DD6.12 DD10.12 | length 6605.8
  Top Layer w10: v1(4151.5,2802.5) 4151.5,2615.5 4400,2366.99 DD2.69@4400,2325 ; v1(4583.5,2666.5) 4594.5,2677.5 4645.5,2677.5 4655.5,2687.5 4655.5,2953.5 4671.5,2969.5 4743,2969.5 4756,2956.5 4756,2891.5 4767,2880.5 4832.5,2880.5 v1(4854.5,2902.5) ; v1(4586.5,2740.5) v1(4586.5,2802.5) ; v1(5118.5,2958.5) v1(5118.5,3106.5) ; v1(5692.5,305) v1(5692.5,751.5) ; v1(5950.5,912.5) 5991.5,953.5 v1(5991.5,3207.5)
  Bottom Layer w10: v1(4151.5,2802.5) v1(4586.5,2802.5) ; v1(4583.5,2666.5) 4586.5,2669.5 v1(4586.5,2740.5) ; v1(4854.5,2902.5) 4910.5,2958.5 v1(5118.5,2958.5) ; v1(5118.5,3106.5) 5374.5,3106.5 5497.5,3229.5 5969.5,3229.5 v1(5991.5,3207.5) ; DD10.12@5575,275 5662.5,275 ; v1(5692.5,751.5) 5770.5,829.5 5878.5,829.5 5950.5,901.5 v1(5950.5,912.5) ; DD6.12@5850,375 5762.5,375 v1(5692.5,305) ; 5662.5,275 v1(5692.5,305) ; 5662.5,275 v1(5692.5,305)
VD2: DD2.70 DD6.13 DD10.11 | length 4025.2
  Top Layer w10: v1(5504,2570.5) 5551.24,2523.25 5551.24,2160.5 5510,2119.25 5510,832.66 5529.61,813.06 5529.61,541.89 5551.5,520 5601.5,520 5620,501.5 5620,249.84 5599.04,228.88 5599.04,199.04 DD10.11@5575,175
  Bottom Layer w10: DD2.70@4500,2225 4544.5,2269.5 4725.5,2269.5 4747.5,2291.5 4747.5,2352.99 4768.54,2374.03 4925.17,2374.03 5114.13,2563 5496.5,2563 v1(5504,2570.5) ; DD10.11@5575,175 5662.5,175 5762.5,275 DD6.13@5850,275
VD3: DD2.61 DD6.15 DD10.14 | length 6756
  Top Layer w10: v1(4454.5,2434.5) 4454.5,2695.24 4522.5,2763.24 4522.5,2939.5 v1(4533.5,2950.5) ; v1(6098.5,3025.5) 6098.5,526.5 DD6.15@6450,175
  Bottom Layer w10: DD2.61@4000,2325 4109.5,2434.5 v1(4454.5,2434.5) ; v1(4533.5,2950.5) 4563.5,2980.5 4965.52,2980.5 5060.52,3075.5 5489.5,3075.5 5534.5,3120.5 6003.5,3120.5 v1(6098.5,3025.5) ; DD10.14@5575,475 5620,520 6105,520 DD6.15@6450,175
VD4: DD2.63 DD6.16 DD10.15 | length 7042.8
  Top Layer w10: v1(4095.5,3043.5) 4095.5,2612.5 4213.5,2494.49 v1(4213.5,2399.5) ; v1(5264.5,2358.5) v1(5264.5,3205.5) ; v1(5674.5,2358.5) 5746.5,2286.5 v1(5746.5,1974.5) ; v1(6238.5,1945.5) 6238.5,486.5 DD6.16@6450,275
  Bottom Layer w10: v1(4095.5,3043.5) 4563.5,3043.5 4600.5,3080.5 4944.5,3080.5 5069.5,3205.5 v1(5264.5,3205.5) ; DD2.63@4100,2325 4174.5,2399.5 v1(4213.5,2399.5) ; v1(5264.5,2358.5) v1(5674.5,2358.5) ; DD10.15@5575,575 5671.25,575 5716.25,620 6105,620 DD6.16@6450,275 ; v1(5746.5,1974.5) 6209.5,1974.5 v1(6238.5,1945.5)
VD5: DD2.64 DD6.17 DD10.16 | length 5615.4
  Top Layer w10: DD2.64@4200,2225 4274.5,2150.5 v1(4274.5,1490.5) ; v1(6129.5,729.5) 6125.5,733.5 6125.5,1751.5 v1(6129.5,1755.5)
  Bottom Layer w10: v1(4274.5,1490.5) 4404.5,1360.5 4404.5,1253.5 4428.5,1229.5 4495.5,1229.5 4649.98,1383.98 4649.98,1446.7 4674.78,1471.5 4938.6,1471.5 5242.6,1775.5 6109.5,1775.5 v1(6129.5,1755.5) ; DD10.16@5575,675 5760,675 5805,720 6105,720 DD6.17@6450,375 6450,408.99 v1(6129.5,729.5)
VD6: DD2.65 DD6.18 DD10.17 | length 5324.9
  Top Layer w10: DD2.65@4200,2325 4244.5,2369.5 4331.5,2369.5 4355.5,2345.5 4355.5,2200.5 4374.5,2181.5 4374.5,1977.37 4427.5,1924.37 v1(4427.5,1895.5) ; v1(5498.5,512.5) v1(5498.5,775.5) 5490,783.99 5490,2149 v1(5508.13,2167.13)
  Bottom Layer w10: v1(4427.5,1895.5) 4436.5,1886.5 4785,1886.5 4800.02,1901.52 5051.11,1901.52 5316.72,2167.13 v1(5508.13,2167.13) ; v1(5498.5,512.5) 5458.5,472.5 5458.5,382.5 5511.5,329.5 5659.5,329.5 5735.5,405.5 5816.5,405.5 5836.5,425.5 5918.5,425.5 6213.99,130 6473.5,130 6495,151.5 6495,430 DD6.18@6450,475 ; v1(5498.5,775.5) 5498.99,775 DD10.17@5575,775
VD7: DD2.67 DD6.19 DD10.18 | length 9663
  Top Layer w10: v1(4155.5,1931.5) 4155.5,2251.5 4184.5,2280.5 4255.5,2280.5 DD2.67@4300,2325 ; DD10.18@5575,875 5625.5,925.5 5625.5,1378.5 5671.5,1424.5 5881.5,1424.5 5895.5,1438.5 5895.5,1542.5 5884.5,1553.5 ; v1(5670.5,2530.5) 5884.5,2316.5 ; DD6.19@6450,575 6495,530 6495,251.5 6473,229.5 6427.5,229.5 6168.5,488.5 6168.5,1623.5 6145.5,1646.5 6145.5,1724.5 6160.24,1739.24 6160.24,1777.75 6130.5,1807.5 6130.5,3117.5 5998.5,3249.5 5942.5,3249.5 5899.24,3206.24 5899.24,3014.73 5884.5,2999.98 5884.5,2316.5 ; 5884.5,1553.5 5884.5,2316.5 ; 5884.5,1553.5 5884.5,2316.5
  Bottom Layer w10: v1(4155.5,1931.5) 4252.75,2028.75 4744.16,2028.75 5225.16,2509.75 5555.49,2520.5 5660.5,2520.5 v1(5670.5,2530.5)
VRAM: DD2.58 DD6.20 | length 4767.2
  Top Layer w10: DD2.58@3900,2225 3900,2063.99 4033.5,1930.5 4033.5,1644.5 v1(4156.5,1521.5)
  Bottom Layer w10: v1(4156.5,1521.5) 4747.5,1521.5 4758.5,1510.5 4945.5,1510.5 5347.5,1912.5 6616.5,1912.5 6640.5,1888.5 6640.5,865.5 DD6.20@6450,675
VRD: DD2.54 DD6.22 | length 5391.4
  Top Layer w10: v1(3700,1943.99) DD2.54@3700,2225 ; v1(6330.5,2731.5) 6370.5,2691.5 6370.5,1285.5 6426.5,1229.5 6471.5,1229.5 6495.5,1205.5 6495.5,1149.5 6471.5,1125.5 6431.5,1125.5 6404.5,1098.5 6404.5,920.5 DD6.22@6450,875
  Bottom Layer w10: v1(3700,1943.99) 3700,1881.5 3741.24,1840.25 4306.5,1840.25 4422.5,1956.24 4804.87,1956.24 4871.53,2022.9 4941.5,2022.9 5242.09,2323.5 5739.99,2323.5 6146.5,2730 6329,2730 v1(6330.5,2731.5)
VWR: DD2.41 DD6.27 | length 7533.6
  Top Layer w10: v1(3235.5,4045.5) 3235.5,3101.5 3413.5,2923.5 v1(3413.5,2896.5) ; DD6.27@6450,1375 6495,1420 6495,1496.99 6424.75,1567.24 6424.75,1734.01 6546.5,1855.76 v1(6546.5,4029.5)
  Bottom Layer w10: v1(3235.5,4045.5) 3265.24,4015.75 3532.24,4015.75 3564.59,4048.09 4428.28,4048.09 4446.91,4066.73 5119.27,4066.73 5156.5,4029.5 v1(6546.5,4029.5) ; v1(3413.5,2896.5) 3571.5,2896.5 DD2.41@3600,2925
WAIT_CPU: DD1.24 DD2.17 | length 3866.3
  Top Layer w10: v1(4517.5,3479.5) 5167.5,4129.5 5791.5,4129.5 5841.5,4079.5 5841.5,3080.22 5837.51,3076.23 5837.51,2512.48 v1(5841.5,2508.5)
  Bottom Layer w10: DD2.17@4500,3325 4544.5,3369.5 4544.5,3452.5 v1(4517.5,3479.5) ; v1(5841.5,2508.5) 6108,2775 DD1.24@6225,2775
WR: DD1.22 DD2.8 DD3.29 DD7.18 | length 7394.1
  Top Layer w10: DD7.18@2425,2675 2379.5,2720.5 2379.5,3197.5 2411.5,3229.5 v1(2529.5,3229.5) ; DD3.29@4450,1375 4564,1375 4620.5,1431.5 ; v1(4620.5,1563.5) 4620.5,1515.5 ; DD2.8@4700,3125 4594,3125 4564.24,3095.24 4564.24,2919.96 4555.5,2911.21 4555.5,2740.24 4498.75,2683.5 4498.75,2499.75 4555.5,2443 4555.5,2301.94 4529.05,2275.5 4479.5,2275.5 4455.5,2251.5 4455.5,2012.7 4527.24,1940.95 4527.24,1910.24 4401.5,1784.5 4401.5,1751.5 4427.52,1725.47 4463.17,1725.47 4505.5,1683.14 4505.5,1630.5 4620.5,1515.5 ; 4620.5,1431.5 4620.5,1515.5 ; 4620.5,1431.5 4620.5,1515.5
  Bottom Layer w10: v1(2529.5,3229.5) 3493.5,3229.5 3542.5,3180.5 4142.99,3180.5 4198.49,3125 DD2.8@4700,3125 ; v1(4620.5,1563.5) 4650.5,1563.5 4850.06,1763.06 5103.2,1763.06 5376.64,2036.5 5686.5,2036.5 DD1.22@6225,2575
pads on no net: DD1.18 DD1.23 DD1.28 DD2.84 DD3.1 DD5.11 DD5.12 DD7.12 DD7.32 DD8.1 DD9.2 DD9.5 DD9.6 DD9.7 DD9.8 DD9.9 DD9.10 DD9.11 DD9.12 DD9.13 DD9.14 DD9.15 DD9.16 DD9.17 DD9.18 DD9.19 DD9.20 DD9.21 DD9.26 DD9.39 DD11.8 DD11.9 DD11.10 DD11.11 DD11.12 DD11.13 SW1.3 SW1.4 SW1.5 X1.2 X2.2 X2.6 X2.M1 X2.M2 X2.M3 X3.M1 X3.M2 X3.M3 X4.0 X4.8 X4.9 X4.10 X4.11 X6.6 X6.7 X6.8 X7.3 X7.4 X7.6 X7.8

## Keep-outs
Keep-Out Layer:
  the board outline again, w10

## Text inside footprints (layer, text, board x,y; h text height)
DD2: Top Overlay "75" at 4918.13,2297.22 h67.5 r90; Top Overlay "54" at 3659.72,2106.87 h67.5; Top Overlay "33" at 3481.87,3352.78 h67.5 r270; Top Overlay "12" at 4727.78,3543.13 h67.5 r180; Top Overlay "1" at 4918.13,2811.12 h67.5 r90; Mechanical 1 "75" at 4918.13,2297.22 h67.5 r90; Mechanical 1 "54" at 3659.72,2106.87 h67.5; Mechanical 1 "33" at 3481.87,3352.78 h67.5 r270; Mechanical 1 "12" at 4727.78,3543.13 h67.5 r180; Mechanical 1 "1" at 4918.13,2811.12 h67.5 r90